# Altium PCB AD7793.PcbDoc
Units mil, origin at the board's own origin, x right, y up, seen from the top; angles counter-clockwise.
Board outline 1965.73 x 1817.58 mil, 4 copper layers (TopLayer, MidLayer2, MidLayer1, BottomLayer); 47 components, 36 nets, 151 pads, 41 vias.
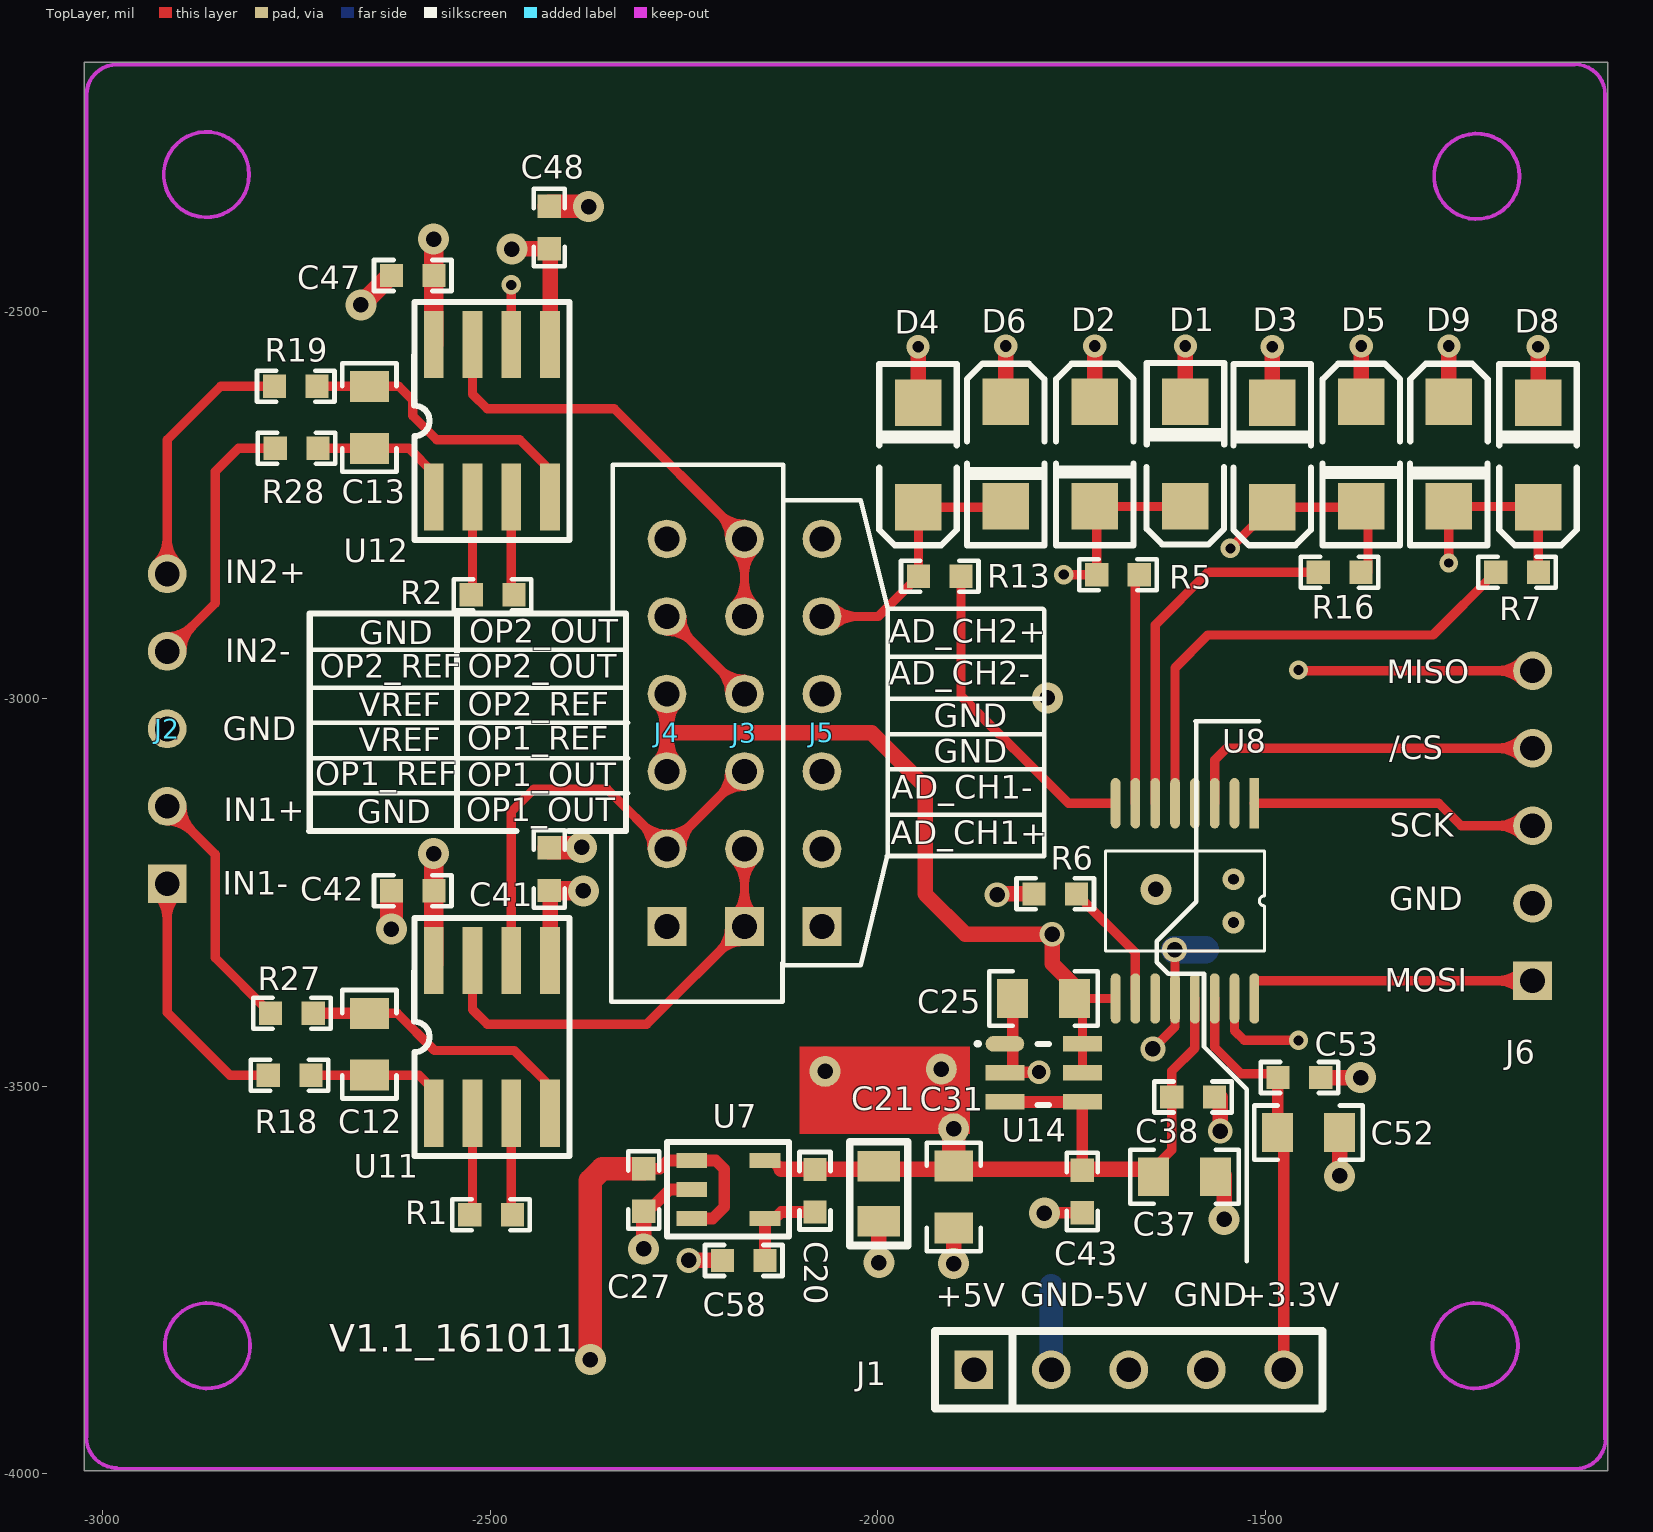
[diagram p0: TopLayer view]
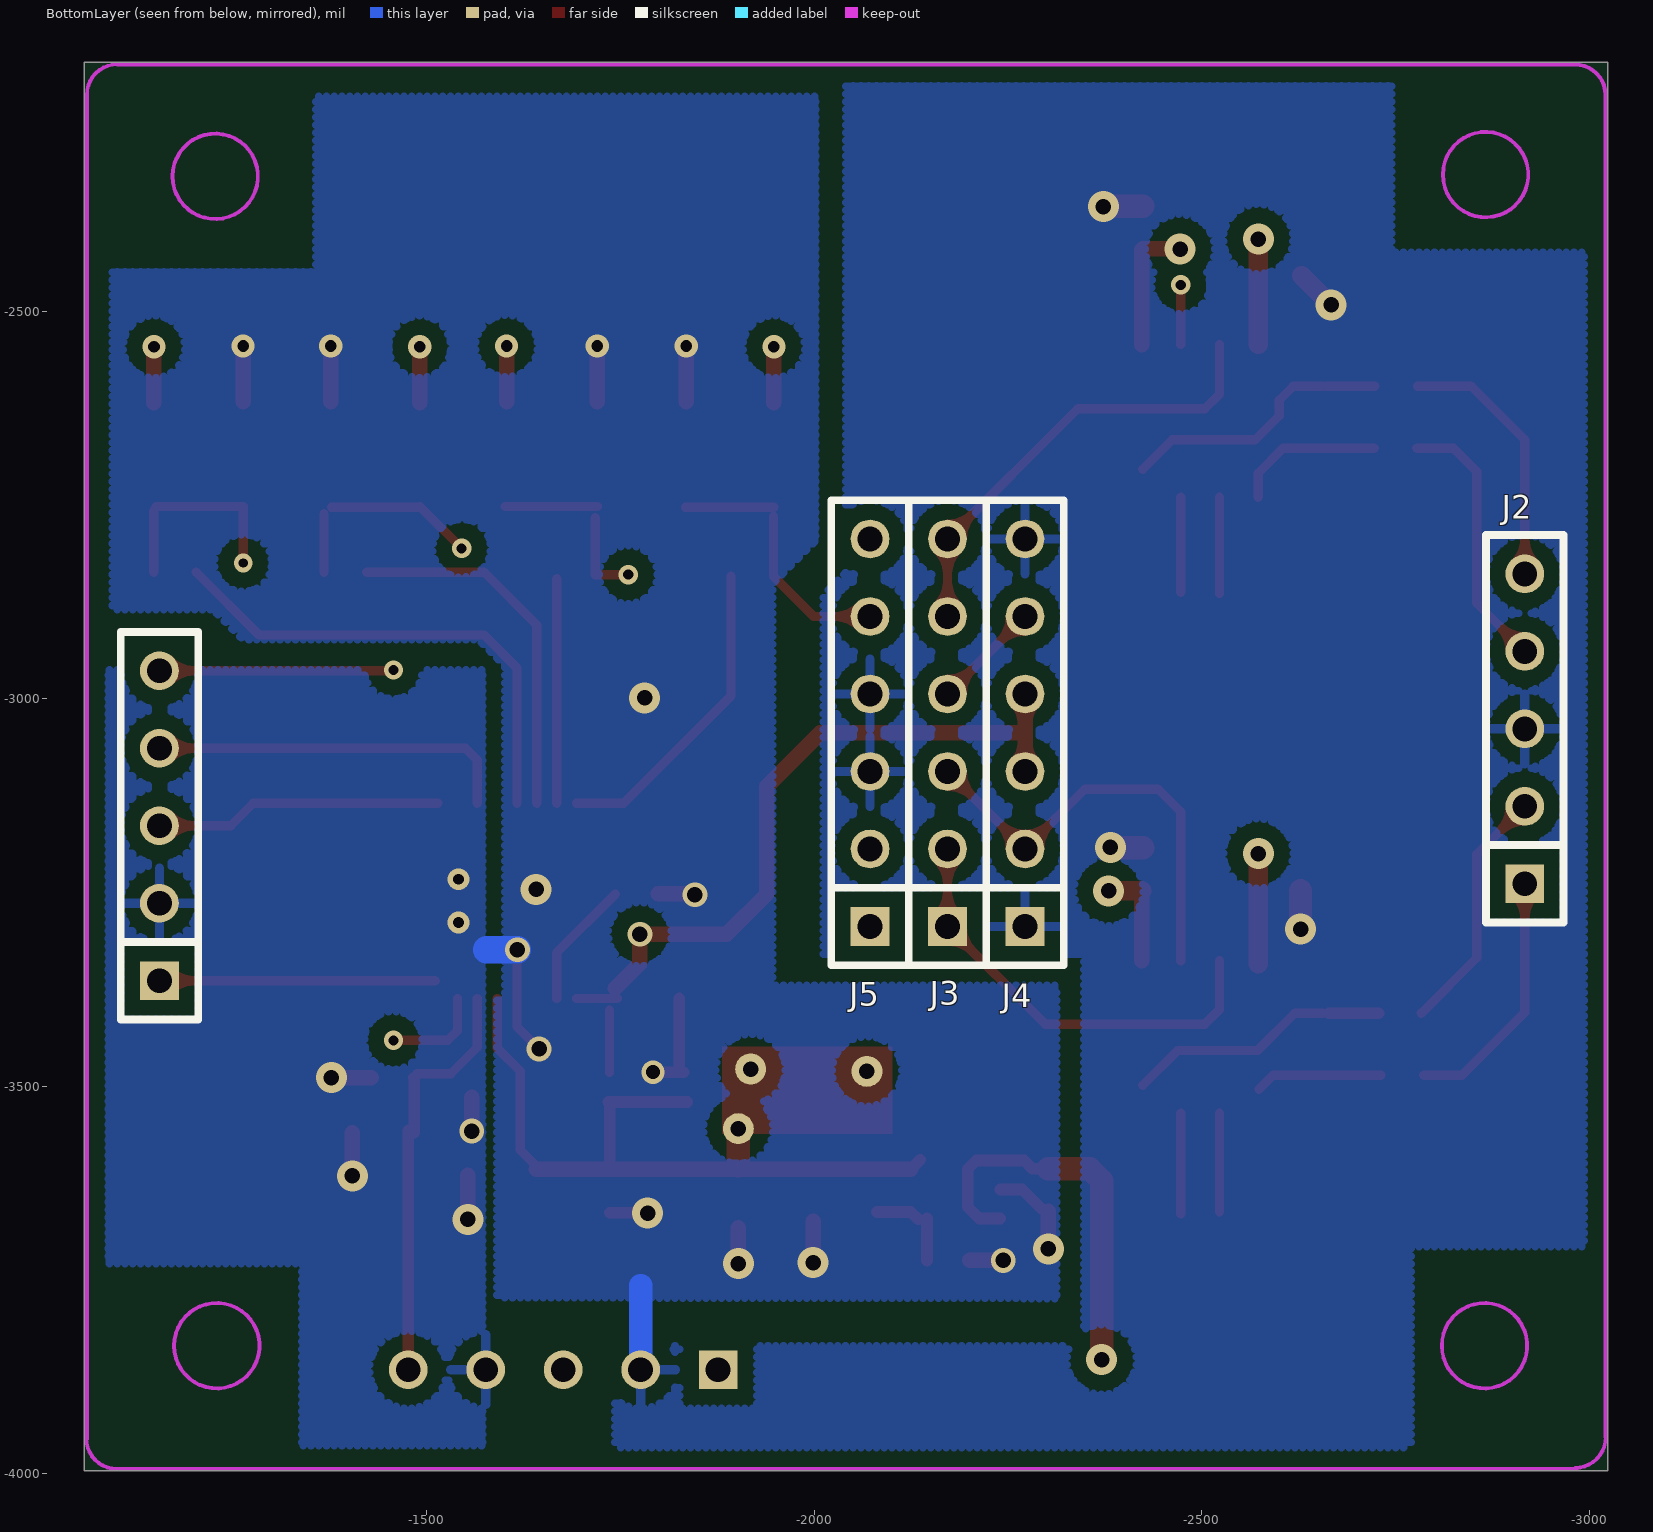
[diagram p1: BottomLayer view, seen from below]
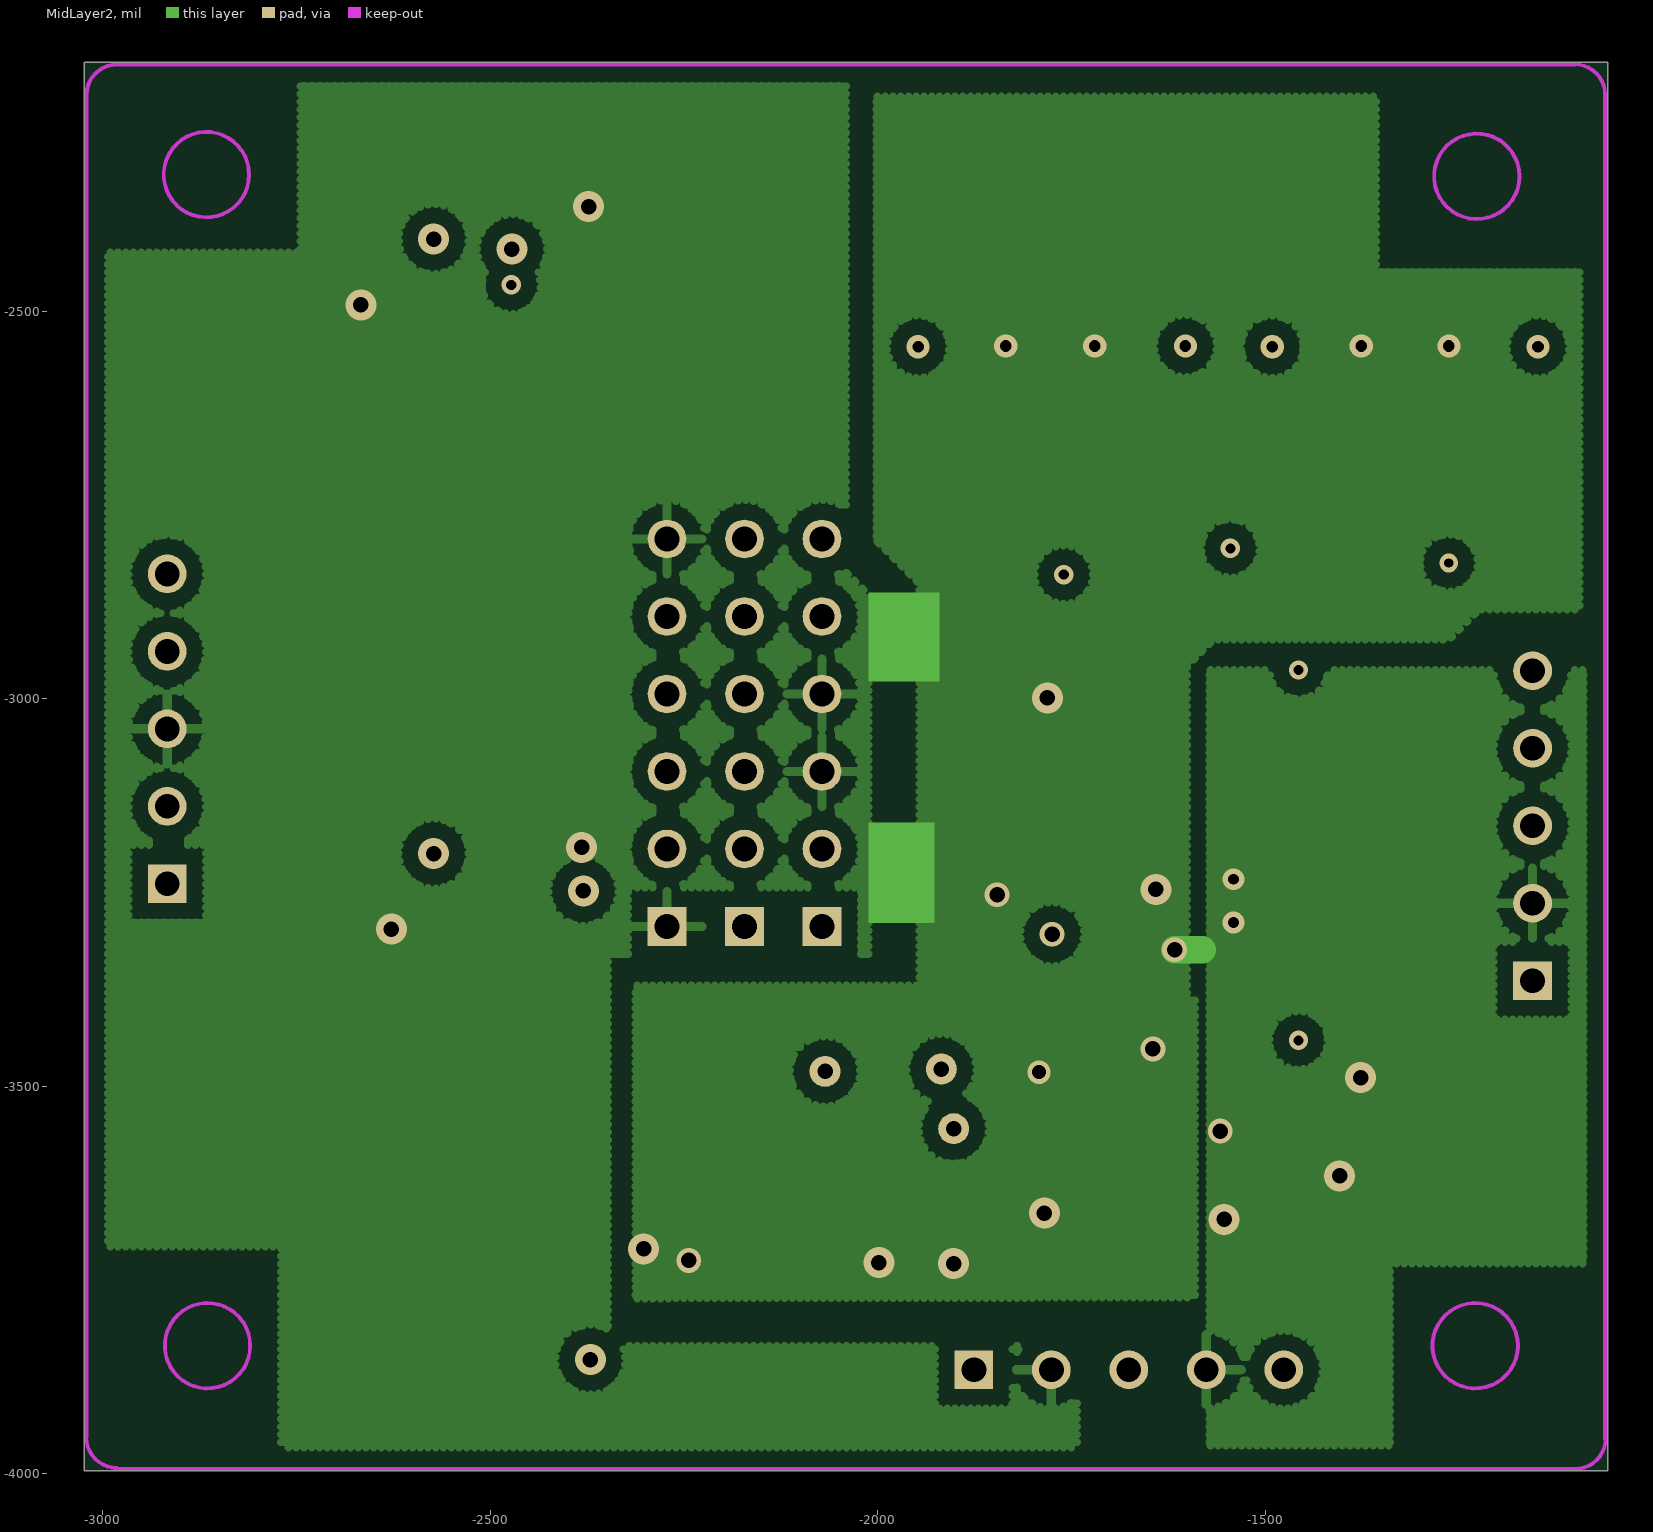
[diagram p2: MidLayer2]
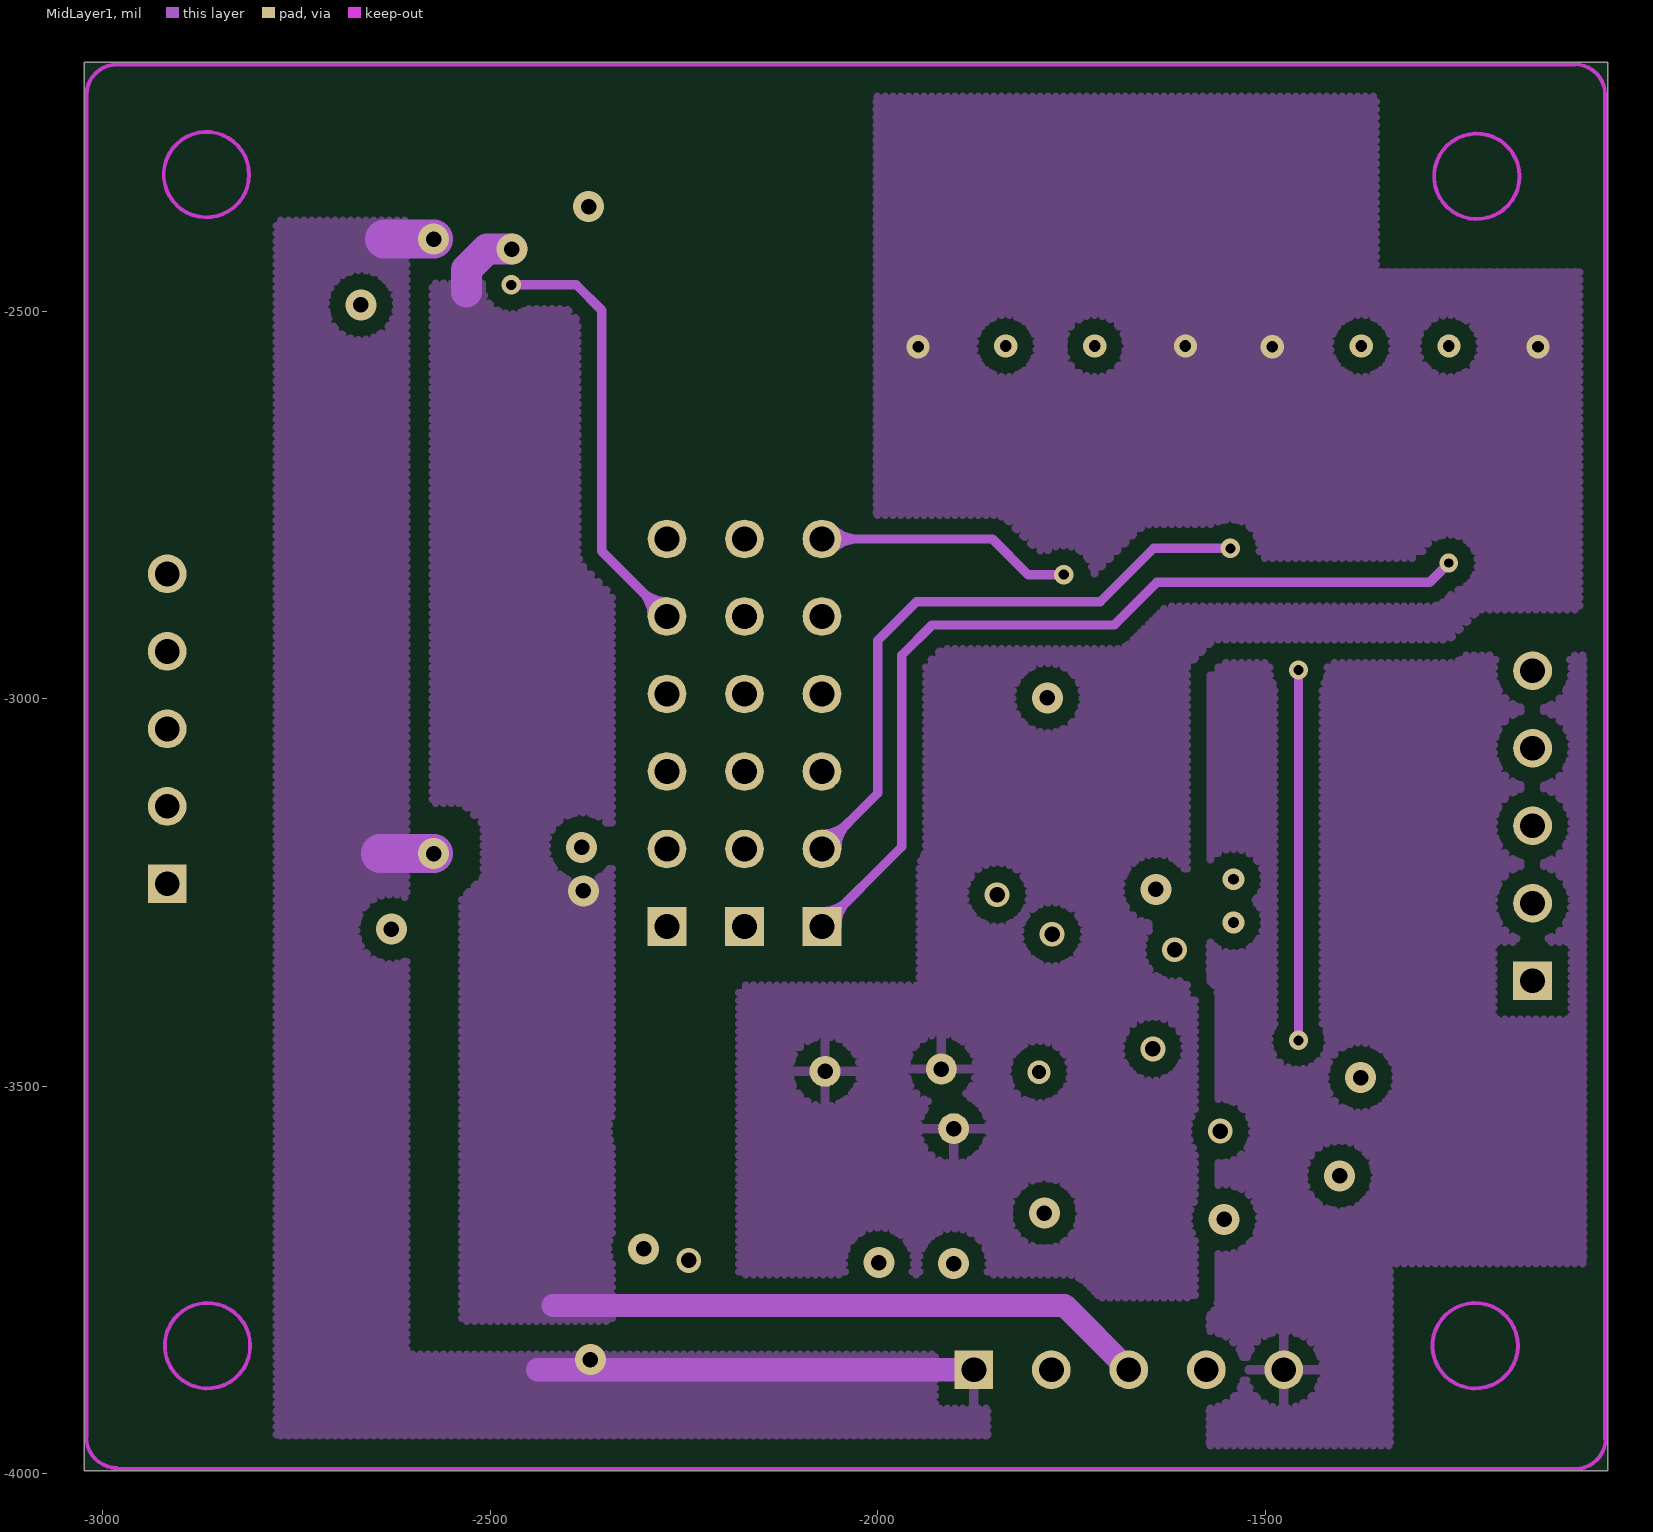
[diagram p3: MidLayer1]

## Layer stack, top to bottom
TopLayer: signal copper 1.4
Dielectric: core 12.6, FR-4, Dk 4.8
MidLayer2: signal copper 1.4
Dielectric: prepreg 12.6, FR-4, Dk 4.8
MidLayer1: signal copper 1.4
Dielectric: core 12.6, FR-4, Dk 4.8
BottomLayer: signal copper 1.4

## Board outline
-3023.86,-3996.5 -1058.13,-3996.5 -1058.13,-2178.92 -3023.86,-2178.92

## Design rules (kind name [scope] priority, off if disabled: settings)
Clearance Clearance_2 [InNet('NetL2_2') vs (InPoly)] p1 off: gap=78.74
Clearance Clearance_3 [InNet('NetL2_2') vs (InPoly)] p2 off: gap=78.74
Clearance Clearance_1 [(InPoly)] p3 off: gap=15.75
Clearance Clearance_5 [All] p4 off: gap=25
Clearance Clearance_6 [All] p5 off: gap=20
Clearance [All] p6 off: gap=15
Clearance Clearance_4 [All] p7: gap=6
ComponentClearance [All] p1 off: gap=10 collisioncheckmode=3 verticalgap=10 showdistances=FALSE
FabricationTestPointUsage TestPointUsage [All] p1: valid=0 allowmultiple=FALSE
FabricationTestpoint Testpoint [All] p1: side=3 testpointundercomponent=TRUE minsize=40 maxsize=100 preferedsize=60 minholesize=20 maxholesize=40 preferedholesize=32 testpointgrid=1 allowsidetop=TRUE allowsidebottom=TRUE usegrid=TRUE gridtolerance=0.01
PolygonConnect [All] p1: connectstyle=Relief reliefconductorwidth=12 reliefentries=4 polygonreliefangle="90 Angle" airgapwidth=10
RoutingLayers [All] p1: top layer_v5=TRUE mid layer 1_v5=FALSE mid layer 2_v5=FALSE bottom layer_v5=TRUE
RoutingVias [All] p1: holewidth=28 width=50 viastyle="Through Hole" minholewidth=28 minwidth=50 maxholewidth=28 maxwidth=50
ShortCircuit [All] p1 off: allowed=FALSE
SolderMaskExpansion [All] p1: expansion=4
Width [All] p1: maxlimit=196.85 minlimit=5 preferedwidth=30
23 further rules are at their usual default settings.

## Components (designator, comment, footprint, x,y, rotation, side; value= is the part's Value field where it differs from the comment)
C12 "10n/NP0" 0805 -2661,-3446 r270 top
C13 "10n/NP0" 0805 -2651,-2637 r90 top
C20 "10nF" 0603 -2076,-3635 r270 top
C21 "1uF" 0805N -1999,-3639 r90 top
C25 "10n/NP0" 0805 -1786,-3392 r0 top
C27 "1uF" 0603 -2307,-3634 r90 top
C31 "10uF" 0805 -1907,-3643 r270 top
C37 "10uF" 0805 -1604,-3612 r180 top
C38 "104" 0603 -1593,-3509 r0 top
C41 "104" 0603 -2429,-3220 r90 top
C42 "104" 0603 -2600,-3243 r0 top
C43 "0.47uF" 0603 -1741,-3636 r90 top
C47 "104" 0603 -2600,-2449 r0 top
C48 "104" 0603 -2429,-2392 r90 top
C52 "10uF" 0805 -1444,-3555 r180 top
C53 "104" 0603 -1456,-3484 r0 top
C58 "10nF" 0603 -2173,-3730 r180 top
D1 "SL02" DO-219AB -1603,-2752 r270 top
D2 "SL02" DO-219AB -1720,-2617 r90 top
D3 "SL02" DO-219AB -1491,-2753 r270 top
D4 "SL02" DO-219AB -1948,-2753 r270 top
D5 "SL02" DO-219AB -1376,-2617 r90 top
D6 "SL02" DO-219AB -1835,-2617 r90 top
D8 "SL02" DO-219AB -1148,-2753 r270 top
D9 "SL02" DO-219AB -1263,-2617 r90 top
J1 "" SIP5 -1876,-3866 r0 top
J2 "" SIP5 -2917,-3239 r90 top
J3 "" SIP6 -2172,-3294 r90 top
J4 "" SIP6 -2272,-3294 r90 top
J5 "" SIP6 -2072,-3294 r90 top
J6 "" SIP5 -1155,-3364 r90 top
R1 "10K" 0603 -2499,-3671 r180 top
R2 "10K" 0603 -2497,-2871 r180 top
R5 "0" 0603 -1690,-2835 r0 top
R6 "0" 0603 -1771,-3257 r180 top
R7 "10" 0603 -1175,-2832 r0 top
R13 "10" 0603 -1920,-2837 r0 top
R16 "10" 0603 -1404,-2832 r0 top
R18 "1K" 0603 -2759,-3491 r180 top
R19 "1K" 0603 -2751,-2602 r180 top
R27 "1K" 0603 -2756,-3411 r180 top
R28 "1K" 0603 -2750,-2682 r180 top
U7 "AS1358/9-BTTT-33" SOT23-5 -2240,-3596 r270 top
U8 "AD7793BR" TSSOP-16 -1514,-3135 r270 top
U11 "AD8227" S8 -2573,-3535 r90 top
U12 "AD8227" S8 -2573,-2740 r90 top
U14 "REF3212" SOT-23(6) -1835.9,-3445.5 r270 top

## Footprints (in the part's own frame and the unit in brackets; to place one, negate y for a bottom-side part, rotate by r counter-clockwise, add the part's x,y. Pads: shape width x height; smd on the part's side, far side on the other; paste and mask are expansions set on the pad)
0603 [mil]
  rect 30x30 smd: 1(27.5,-5) 2(-27.5,-5)
  silkscreen extent -50,-25 50,15
0805 [mil]
  rect 40x50 smd: 1(-40,5) 2(40,5)
  silkscreen extent -70,-30 70,40
0805N [mm]
  rect 1x1.4 smd: 1(-0.896,-0.009) 2(0.904,-0.009)
  silkscreen extent -1.7,-0.96 1.7,0.94
DO-219AB [mil]
  rect 60x60 smd: A(0,0) K(-135,0)
  silkscreen extent -185,-50 49,50
S8 [mm]
  rect 2.2x0.65 smd: 1(0.001,-0.001) 2(0.001,-1.271) 3(0.001,-2.541) 4(0.001,-3.811) 5(5.001,-3.811) 6(5.001,-2.541) 7(5.001,-1.271) 8(5.001,-0.001)
  silkscreen extent -1.4,-4.45 6.4,0.64
SIP5 [mil]
  rect 50x50 hole 32: 1(0,0)
  round 50 hole 32: 2(100,0) 3(200,0) 4(300,0) 5(400,0)
  silkscreen extent -50,-50 450,50
SIP6 [mil]
  rect 50x50 hole 32: 1(0,0)
  round 50 hole 32: 2(100,0) 3(200,0) 4(300,0) 5(400,0) 6(500,0)
SOT23-5 [mm]
  rect 0.5x1 smd: 1(0,0) 2(0.95,0) 3(1.9,0) 4(1.9,2.4) 5(0,2.4)
  silkscreen extent -0.61,-0.81 2.49,3.19
SOT-23(6) [mil]
  oval 20x50 smd: 1(0,0)
  rect 20x50 smd: 2(37,0) 3(75,0) 4(75,100) 5(37,100) 6(0,100)
  silkscreen extent 0,-35 79,57
TSSOP-16 [mil]
  rect 65x12.5 smd: 1(0,0)
  oval 65x12.5 smd: 2(0,-25.59) 3(0,-51.18) 4(0,-76.77) 5(0,-102.36) 6(0,-127.95) 7(0,-153.54) 8(0,-179.13) 9(251.97,-179.13) 10(251.97,-153.54) 11(251.97,-127.95) 12(251.97,-102.36) 13(251.97,-76.77) 14(251.97,-51.18) 15(251.97,-25.59) 16(251.97,0)
  silkscreen extent 61,-192 191,13

## Free pads (board coordinates)
  round 40 hole 20: 0(-2068,-3481) 0(-1918,-3478) 0(-1902,-3555)

## Via types
v1: diameter 40, hole 20, TopLayer to BottomLayer, 18 vias
v2: diameter 30, hole 15, TopLayer to BottomLayer, 8 vias
v3: diameter 32, hole 20, TopLayer to BottomLayer, 6 vias
v4: diameter 25, hole 13, TopLayer to BottomLayer, 5 vias
v5: diameter 28, hole 14, TopLayer to BottomLayer, 2 vias
v6: diameter 24, hole 12, TopLayer to BottomLayer, 1 vias
v7: diameter 30, hole 18, TopLayer to BottomLayer, 1 vias

## Nets (pads, with @x,y where several pads share a name; then routed paths per layer and width w, separated by ;. In a path a pad name is that pad's centre, name@x,y a point inside that pad or via, vN(x,y) a via of type N, cw(c..) or ccw(c..) an arc to the next point about the centre after c; other vN are vias at no path point)
+3.3V: C52.2 C53.2 J1.5 U8.14 | length 535.4
  TopLayer w12: U8.14 -1565.18,-3449.82 -1531,-3484 C53.2@-1487,-3484
  TopLayer w15: C52.2 -1484,-3489.5 C53.2 ; J1.5 C52.2@-1476,-3557
+A3.3V: C20.2 C21.2 C31.1 C37.2 C38.2 C43.1 D1.K D3.K D4.K D8.K pad.0 U7.5 U8.13 U14.3 U14.4 | length 1258.6
  TopLayer w12: C37.2@-1638,-3600 -1620.5,-3582.5 -1620.5,-3480.5 -1590.77,-3450.77 U8.13
  TopLayer w15: U7.5@-2137,-3595 -2124.5,-3607.5 ; U14.3 U14.4@-1734.5,-3520.5 ; C43.1@-1735.9,-3608.4 U14.4
  TopLayer w20: -2124.5,-3607.5 C37.2@-1641.5,-3607.5 ; D4.K v2(-1948,-2546) ; D1.K v2(-1603,-2545) ; D3.K v2(-1491,-2546) ; D8.K v2(-1148,-2546)
  TopLayer w30: C31.1 pad.0@-1902,-3555
+A5V: C27.1 C42.1 C47.1 J1.1 U7.1 U7.3 U11.8 U12.8 | length 1490.5
  TopLayer w15: C27.1 -2281.5,-3606.5 -2271,-3596 U7.1 -2209,-3596 -2198,-3607 -2198,-3656 -2212.8,-3670.8 U7.3
  TopLayer w25: U11.8@-2573,-3342 v1(-2573,-3200) ; U12.8 v1(-2573,-2407)
  TopLayer w30: v1(-2371,-3853) -2371,-3622 -2355.5,-3606.5 C27.1
  MidLayer1 w30: -2439,-3866 J1.1
  MidLayer1 w50: -2642,-3200 v1(-2573,-3200) ; -2637,-2407 v1(-2573,-2407)
-A5V: C41.2 C48.2 J1.3 U11.5 U12.5 | length 1185
  TopLayer w20: v1(-2472,-2420) -2471.5,-2419.5 C48.2 ; U11.5 C41.2@-2422.95,-3247.95 ; U12.5 C48.2@-2422.95,-2420.55
  TopLayer w25: C41.2@-2422.95,-3247.95 v1@-2373.95,-3247.95
  MidLayer1 w30: -2418.69,-3783 -1759,-3783 J1.3
  MidLayer1 w40: -2530.47,-2475 -2530.47,-2446.47 -2504,-2420 v1(-2472,-2420)
  other v1: -2380,-3247.95
AD1_CS1: J6.4 U8.3 | length 544.3
  TopLayer w12: U8.3 -1565.18,-3079.18 -1550,-3064 J6.4 ; J6.4@-1168.44,-3077.44 ccw(c-1200.87,-3109.87) -1200.87,-3064 ccw(c-1200.87,-3018.13) J6.4@-1168.44,-3050.56
AD1_MISO1: J6.5 U8.15 | length 976.3
  TopLayer w12: U8.15 -1539.59,-3428.41 -1527,-3441 v4(-1457,-3441) ; v4@-1455,-2964 J6.5 ; J6.5@-1168.44,-2977.44 ccw(c-1200.87,-3009.87) -1200.87,-2964 ccw(c-1200.87,-2918.13) J6.5@-1168.44,-2950.56
  MidLayer1 w12: v4(-1457,-3441) v4@-1457,-2966
  other v4: -1457,-2963
AD1_MOSI1: J6.1 U8.16 | length 428.1
  TopLayer w12: U8.16@-1511,-3364 J6.1 ; J6.1@-1168.44,-3377.44 ccw(c-1200.87,-3409.87) -1200.87,-3364 ccw(c-1200.87,-3318.13) J6.1@-1168.44,-3350.56
AD1_SCK1: J6.3 U8.1 | length 443.1
  TopLayer w12: U8.1 -1276,-3135 -1247,-3164 J6.3 ; J6.3@-1168.44,-3177.43 ccw(c-1200.87,-3209.87) -1200.87,-3164 ccw(c-1200.87,-3118.13) J6.3@-1168.44,-3150.56
AD_CH1+: D8.A D9.K J5.1 R7.1 | length 1484.5
  TopLayer w12: v6(-1263,-2825) D9.K D8.A@-1151,-2752 ; R7.1 D8.A@-1147.5,-2757.5
  MidLayer1 w12: J5.1 -1969,-3191 -1969,-2944 -1930,-2905 -1695,-2905 -1640,-2850 -1288,-2850 v6(-1263,-2825) ; J5.1@-2072,-3275 ccw(c-2072,-3229.13) -2039.56,-3261.56 ccw(c-2007.13,-3294) J5.1@-2053,-3294
AD_CH1-: D3.A D5.K J5.2 R16.1 | length 1142
  TopLayer w12: v4(-1545,-2806) -1491,-2752 D3.A D5.K@-1377,-2753 ; R16.1@-1367.5,-2837 D5.K@-1367.5,-2761.5
  MidLayer1 w12: J5.2 -2000,-3122 -2000,-2925 -1950,-2875 -1713,-2875 -1644,-2806 v4(-1545,-2806) ; J5.2@-2072,-3175 ccw(c-2072,-3129.13) -2039.56,-3161.56 ccw(c-2007.13,-3194) J5.2@-2053,-3194
AD_CH2+: D1.A D2.K J5.6 R5.2 | length 638.1
  TopLayer w12: v4(-1760,-2840) R5.2 D2.K@-1717.5,-2766.5 ; D2.K D1.A@-1601,-2752
  MidLayer1 w12: J5.6 -1852,-2794 -1806,-2840 v4(-1760,-2840) ; J5.6@-2058.56,-2807.44 cw(c-2026.13,-2839.87) -2026.13,-2794 cw(c-2026.13,-2748.13) J5.6@-2058.56,-2780.56
AD_CH21-: D4.A D6.K J5.5 R13.2 | length 409.6
  TopLayer w12: J5.5 -1999.5,-2894 R13.2 D4.A@-1947.5,-2764.5 ; J5.5@-2058.56,-2907.44 cw(c-2026.13,-2939.87) -2026.13,-2894 cw(c-2026.13,-2848.13) J5.5@-2058.56,-2880.56 ; D4.A D6.K@-1834,-2753
AIN1+: J2.2 R27.1 | length 394.4
  TopLayer w12: J2.2@-2917,-3158 cw(c-2917,-3203.87) -2884.56,-3171.44 cw(c-2852.13,-3139) J2.2@-2898,-3139 ; J2.2 -2855,-3201 -2855,-3334.5 R27.1
AIN1-: J2.1 R18.1 | length 402.1
  TopLayer w12: J2.1@-2930.44,-3252.44 cw(c-2962.87,-3284.87) -2917,-3284.87 cw(c-2871.13,-3284.87) J2.1@-2903.56,-3252.44 ; J2.1 -2917,-3405 -2836,-3486 R18.1
AIN2+: J2.5 R19.1 | length 412.1
  TopLayer w12: J2.5@-2930.44,-2825.56 ccw(c-2962.87,-2793.13) -2917,-2793.13 ccw(c-2871.13,-2793.13) J2.5@-2903.56,-2825.56 ; J2.5 -2917,-2666 -2848,-2597 R19.1
AIN2-: J2.4 R28.1 | length 419.7
  TopLayer w12: J2.4 -2855,-2877 -2855,-2707 -2825,-2677 R28.1 ; J2.4@-2917,-2920 ccw(c-2917,-2874.13) -2884.56,-2906.56 ccw(c-2852.13,-2939) J2.4@-2898,-2939
GND: C21.1 C25.1 C27.2 C31.2 C37.1 C38.1 C41.1 C42.2 C43.2 C47.2 C48.1 C52.1 C53.1 C58.1 D2.A D5.A D6.A D9.A J1.2 J1.4 J2.3 J4.1 J4.6 J5.3 J5.4 J6.2 R6.1 U7.2 U8.12 U14.1 U14.2 | length 1488.9
  TopLayer w12: v3(-1645,-3452) -1616.36,-3423.36 U8.12 v3@-1616.36,-3324.64
  TopLayer w15: C27.2@-2293,-3658 -2268.4,-3633.4 U7.2 ; U14.2@-1831.4,-3482 v7(-1792,-3482) ; U14.2@-1826,-3479 C25.1 ; v1@-1784.5,-3663.5 C43.2
  TopLayer w20: v1(-2302,-3710) C27.2 ; v3(-2244,-3725) C58.1 ; v1(-1998.64,-3727.64) C21.1 ; v1(-1902,-3729) C31.2 ; v3@-1845,-3252 R6.1 ; D6.A v2(-1835,-2545) ; D2.A v2(-1720,-2545) ; v3(-1558,-3558) C38.1@-1558,-3514.5 ; v1(-1553,-3672) C37.1@-1553,-3615 ; C53.1 v1(-1377,-3489) ; v1(-1404,-3616) C52.1 ; D5.A v2(-1376,-2545) ; D9.A v2(-1263,-2545)
  TopLayer w25: v1(-2667,-2492) C47.2@-2629,-2454
  TopLayer w30: v1(-2627.5,-3297.5) C42.2 ; C41.1 v1@-2382.5,-3192.5 ; C48.1 v1@-2380.5,-2364.5
  MidLayer2 w35: v3(-1617,-3324) -1581,-3324
  BottomLayer w30: J1.2 -1776,-3757.47
  BottomLayer w35: v3(-1617,-3324) -1577,-3324
  other v1: -1785,-3664 -1641,-3246 -2382,-3192 -1781,-2999 -2373,-2365
  other v3: -1846,-3253
  other v5: -1541,-3289 -1541,-3233
NetR1_1: R1.1 U11.2 | length 127.5
  TopLayer w12: R1.1@-2522.95,-3662.45 U11.2
NetR1_2: R1.2 U11.3 | length 129.6
  TopLayer w12: R1.2@-2472.95,-3664.55 U11.3
NetR2_1: R2.1 U12.2 | length 124.5
  TopLayer w12: R2.1@-2522.95,-2864.45 U12.2
NetR2_2: R2.2 U12.3 | length 122.6
  TopLayer w12: R2.2@-2472.95,-2862.55 U12.3
NetR5_1: R5.1 U8.7 | length 289.5
  TopLayer w12: U8.7 R5.1@-1667.54,-2845.46
NetR7_2: R7.2 U8.5 | length 639.6
  TopLayer w12: U8.5 -1616.36,-2960.36 -1574,-2918 -1283.5,-2918 R7.2
NetR13_1: R13.1 U8.8 | length 411.2
  TopLayer w12: R13.1 -1892.5,-2996.5 -1754,-3135 U8.8
NetR16_2: R16.2 U8.6 | length 477.6
  TopLayer w12: U8.6 -1641.95,-2904.95 -1574,-2837 R16.2@-1422.5,-2837
NetR18_2: C12.2 R18.2 U11.1 | length 165
  TopLayer w12: R18.2 -2592,-3486 U11.1@-2574,-3504
NetR19_2: C13.2 R19.2 U12.4 | length 351.5
  TopLayer w12: R19.2 C13.2@-2660,-2597 ; C13.2 -2618,-2597 -2600,-2615 -2600,-2635 -2569,-2666 -2462,-2666 U12.4@-2424,-2704
NetR27_2: C12.1 R27.2 U11.4 | length 335
  TopLayer w12: C12.1 -2620,-3406 -2572,-3454 -2469,-3454 U11.4@-2424,-3499
  TopLayer w15: R27.2 C12.1@-2664,-3406
NetR28_2: C13.1 R28.2 U12.1 | length 193.7
  TopLayer w12: R28.2 C13.1 -2605,-2677 -2572.95,-2709.05 U12.1
NetU7_4: C20.1 C58.2 U7.4 | length 111.1
  TopLayer w15: C58.2 U7.4 ; U7.4@-2134,-3672 -2124.5,-3662.5 C20.1
NetU8_10: R6.2 U8.10 | length 166.4
  TopLayer w12: R6.2 -1667.54,-3327.96 U8.10
OP1_OUT: J3.1 J3.2 U11.7 | length 790.1
  TopLayer w12: U11.7 -2522.95,-3401.05 -2504,-3420 -2298,-3420 J3.1 J3.2 ; J3.1@-2191,-3294 cw(c-2236.87,-3294) -2204.44,-3326.44 cw(c-2172,-3358.87) J3.1@-2172,-3313 ; J3.1@-2185.44,-3280.56 ccw(c-2217.87,-3248.13) -2172,-3248.13 ccw(c-2126.13,-3248.13) J3.1@-2158.56,-3280.56 ; J3.2@-2185.44,-3207.44 cw(c-2217.87,-3239.87) -2172,-3239.87 cw(c-2126.13,-3239.87) J3.2@-2158.56,-3207.44
OP1_REF: J3.3 J4.2 U11.6 | length 787.5
  TopLayer w12: U11.6 -2472.95,-3145.95 -2444,-3117 -2349,-3117 J4.2@-2277,-3189 ; J4.2@-2291,-3194 ccw(c-2336.87,-3194) -2304.44,-3161.56 ccw(c-2272,-3129.13) -2272,-3175 ccw(c-2272,-3129.13) -2239.56,-3161.56 ccw(c-2207.13,-3194) J4.2@-2253,-3194 ; J4.2 J3.3 ; J3.3@-2191,-3094 cw(c-2236.87,-3094) -2204.44,-3126.44 cw(c-2172,-3158.87) J3.3@-2172,-3113
OP2_OUT: J3.5 J3.6 U12.7 | length 808.5
  TopLayer w12: U12.7 -2522.95,-2607.05 -2504,-2626 -2340,-2626 J3.6 J3.5 ; J3.6@-2191,-2794 ccw(c-2236.87,-2794) -2204.44,-2761.56 ccw(c-2172,-2729.13) J3.6@-2172,-2775 ; J3.5@-2185.44,-2880.56 ccw(c-2217.87,-2848.13) -2172,-2848.13 ccw(c-2126.13,-2848.13) J3.5@-2158.56,-2880.56 ; J3.6@-2185.44,-2807.44 cw(c-2217.87,-2839.87) -2172,-2839.87 cw(c-2126.13,-2839.87) J3.6@-2158.56,-2807.44
OP2_REF: J3.4 J4.5 U12.6 | length 1000.2
  TopLayer w12: U12.6 v4@-2472.95,-2460.95 ; J4.5@-2272,-2913 cw(c-2272,-2958.87) -2239.56,-2926.44 cw(c-2207.13,-2894) J4.5@-2253,-2894 ; J4.5 J3.4 ; J3.4@-2191,-2994 ccw(c-2236.87,-2994) -2204.44,-2961.56 ccw(c-2172,-2929.13) J3.4@-2172,-2975
  MidLayer1 w12: v4(-2472.95,-2466) -2389,-2466 -2356,-2499 -2356,-2810 J4.5 ; J4.5@-2291,-2894 ccw(c-2336.87,-2894) -2304.44,-2861.56 ccw(c-2272,-2829.13) J4.5@-2272,-2875
VREF: C25.2 J4.3 J4.4 U8.9 U14.5 U14.6 | length 1114.4
  TopLayer w12: C25.2 U8.9 ; U14.5 C25.2@-1735.9,-3402.1
  TopLayer w20: J4.3@-2282.61,-3083.39 ccw(c-2308.21,-3057.79) -2272,-3057.79 ccw(c-2235.79,-3057.79) J4.3@-2261.39,-3083.39 ; J4.4@-2282.61,-3004.61 cw(c-2308.21,-3030.21) -2272,-3030.21 cw(c-2235.79,-3030.21) J4.4@-2261.39,-3004.61 ; J4.3 J4.4 ; -2270,-3044 -2008,-3044 -1939,-3113 -1939,-3252 -1887,-3304 v3(-1775,-3304) -1775,-3342 C25.2@-1743,-3374
pads on no net: U8.2 U8.4 U8.11

## Polygon pours and split planes (outlines as drawn)
+3.3V on MidLayer1 "MidLayer1-+3.3V" (hatched 90Degree grid 10 track 10, remove dead copper, pour order 2): -1553,-2944 -1572,-2963 -1572,-3964 -1339,-3964 -1339,-3729 -1080,-3729 -1080,-2944
+A3.3V on MidLayer1 "MidLayer1-+A3.3V" (hatched 90Degree grid 10 track 10, remove dead copper, pour order 4): -1590.77,-3386.97 -1590.77,-3773 -2179,-3773 -2179,-3370 -1946,-3370 -1946,-2852 -2002,-2796 -2002,-2223 -1357,-2223 -1357,-2449 -1094,-2449 -1094,-2885 -1224,-2885 -1263,-2924 -1567,-2924 -1601,-2958 -1601,-3386.97
-A5V on MidLayer1 "MidLayer1--A5V" (hatched 90Degree grid 10 track 10, remove dead copper, pour order 6): -2575,-2464 -2575,-3135 -2536,-3135 -2509,-3162 -2509,-3231 -2537,-3259 -2537,-3803 -2343,-3803 -2343,-2464
+A5V on MidLayer1 "MidLayer1-+A5V" (hatched 90Degree grid 10 track 10, remove dead copper, pour order 8): -2608,-2383 -2608,-3846 -1858,-3846 -1858,-3951 -2776,-3951 -2776,-2383
GND on MidLayer2 "MidLayer2-GND 2" (hatched 90Degree grid 10 track 10, remove dead copper, pour order 10): -1500,-2963 -1572,-2963 -1572,-3964 -1339,-3964 -1339,-3729 -1080,-3729 -1080,-2963
GND on MidLayer2 "MidLayer2-GND 1" (hatched 90Degree grid 10 track 10, remove dead copper, pour order 12): -2745,-2192 -2745,-2424 -3014,-2424 -3014,-3707 -2770,-3707 -2770,-3976 -1743,-3976 -1743,-3835 -2348,-3835 -2348,-3330 -2012,-3330 -2012,-2866 -2041,-2837 -2041,-2191 -2743,-2191
GND on MidLayer2 "MidLayer2-GND" (hatched 90Degree grid 10 track 10, remove dead copper, pour order 14): -1590.77,-3386.97 -1590.77,-3773 -2313,-3774 -2313,-3370 -1946,-3370 -1946,-2852 -2002,-2796 -2002,-2223 -1357,-2223 -1357,-2449 -1094,-2449 -1094,-2885 -1224,-2885 -1263,-2924 -1567,-2924 -1601,-2958 -1601,-3386.97
GND on BottomLayer "BottomLayer-GND 2" (hatched 90Degree grid 10 track 10, remove dead copper, pour order 16): -2745,-2192 -2745,-2424 -3014,-2424 -3014,-3707 -2770,-3707 -2770,-3976 -1743,-3976 -1743,-3835 -2348,-3835 -2348,-3330 -2012,-3330 -2012,-2866 -2041,-2837 -2041,-2191 -2743,-2191
GND on BottomLayer "BottomLayer-GND 1" (hatched 90Degree grid 10 track 10, remove dead copper, pour order 18): -1590.77,-3386.97 -1590.77,-3773 -2313,-3774 -2313,-3370 -1946,-3370 -1946,-2852 -2002,-2796 -2002,-2223 -1357,-2223 -1357,-2449 -1094,-2449 -1094,-2885 -1224,-2885 -1263,-2924 -1567,-2924 -1601,-2958 -1601,-3386.97
GND on BottomLayer "BottomLayer-GND" (hatched 90Degree grid 10 track 10, remove dead copper, pour order 20): -1500,-2963 -1572,-2963 -1572,-3964 -1339,-3964 -1339,-3729 -1080,-3729 -1080,-2963

## Keep-outs
KeepOutLayer:
  circle w5: c-1229,-3835 r55.12
  circle w5: c-2865,-3835 r55.12
  circle w5: c-1227,-2326 r55.12
  circle w5: c-2866.35,-2323.8 r55.12
  lines w5: -3021.36,-3953.21 ccw(c-2981.99,-3953.21) -2981.99,-3992.58 ; -3021,-3953 -3021,-2221 cw(c-2981.63,-2221) -2981.63,-2181.63 -1100.91,-2181.63 ; -2984,-3994 -1100,-3994 ccw(c-1100,-3954.63) -1060.63,-3954.63 ; -1100.7,-2181.42 cw(c-1100.7,-2220.79) -1061.33,-2220.79 -1061.33,-3955.67

## Other copper
TopLayer:
  rectangle net +A3.3V: -2101,-3562 -1881,-3449
MidLayer2:
  rectangle net GND: -2012,-2978 -1920.47,-2863
  rectangle net GND: -2012,-3289.69 -1927,-3159.69

## Silkscreen, mask and mechanical layers (free items; w line width, h text height)
TopOverlay:
  lines w6: -2733,-3077 -2322,-3077 ; -2733,-3031 -2322,-3031 ; -2733,-2986 -2324,-2986 ; -2733,-2937 -2324,-2937 ; -2732,-3122 -2322,-3122 ; -2344,-3171 -2344,-3391 -2123,-3391 -2123,-3341 ; -2342,-2888 -2342,-2698 -2122,-2698 -2122,-2744 ; -1987,-3150 -1785,-3150 ; -1987,-3091 -1785,-3091 ; -1987,-3046 -1785.5,-3046 ; -1987,-3000 -1789.19,-3000 ; -1987,-2946 -1787.19,-2946 ; -1787,-2884 -1987,-2884 ; -1786,-2885 -1785,-2886 -1785,-3203 ; -1524,-3726 -1524,-3504 -1579,-3449 -1579,-3355 -1607,-3355 -1625,-3355 -1640,-3340 -1640,-3313 -1589,-3262 -1589,-3030 -1590,-3029 -1508,-3029 ; -2122,-2744 -2022,-2744 -1987,-2884 ; -2122,-2744 -2122,-3344 -2022,-3344 -1988,-3203 ; -1988,-3203 -1987,-3202 -1987,-2884 ; -1988,-3203 -1785,-3203 ; -1785,-3203 -1785,-3203
  lines w8: -2543,-3171 -2543,-2891 ; -2466,-3171 -2734,-3171 -2733,-3170 -2733,-2890 -2325,-2890 -2325,-3171 -2399,-3171
  text "IN2+" at -2842,-2851 h30
  text "OP2_OUT" at -2527,-2928 h30
  text "AD_CH2+" at -1985,-2928 h30
  text "GND" at -2669,-2930 h30
  text "IN2-" at -2842,-2953 h30
  text "OP2_REF" at -2720,-2973 h30
  text "OP2_OUT" at -2529,-2973 h30
  text "MISO" at -1343,-2980 h30
  text "AD_CH2-" at -1985,-2982 h30
  text "OP2_REF" at -2529,-3022 h30
  text "VREF" at -2670,-3023 h30
  text "GND" at -1928,-3037 h30
  text "GND" at -2845,-3054 h30
  text "OP1_REF" at -2530,-3066 h30
  text "VREF" at -2670,-3068 h30
  text "/CS" at -1340,-3078 h30
  text "GND" at -1928,-3083 h30
  text "OP1_REF" at -2726,-3112 h30
  text "OP1_OUT" at -2530,-3113 h30
  text "AD_CH1-" at -1982,-3129 h30
  text "IN1+" at -2844,-3158 h30
  text "OP1_OUT" at -2531,-3158 h30
  text "GND" at -2672,-3161 h30
  text "SCK" at -1339,-3178 h30
  text "AD_CH1+" at -1983,-3188 h30
  text "IN1-" at -2845,-3253 h30
  text "GND" at -1340,-3273 h30
  text "MOSI" at -1346,-3378 h30
  text "GND" at -1816,-3784 h30
  text "-5V" at -1721,-3784 h30
  text "GND" at -1618,-3784 h30
  text "+3.3V" at -1533,-3784 h30
  text "+5V" at -1925,-3785 h30
  text "V1.1_161011" at -2708,-3843 h36